# Altium PCB PCB.PcbDoc
Units mm, origin at the board's own origin, x right, y up, seen from the top; angles counter-clockwise.
Board outline 100 x 50 mm, 2 copper layers (Top Layer, Bottom Layer); 25 components, 19 nets, 89 pads, 0 vias.
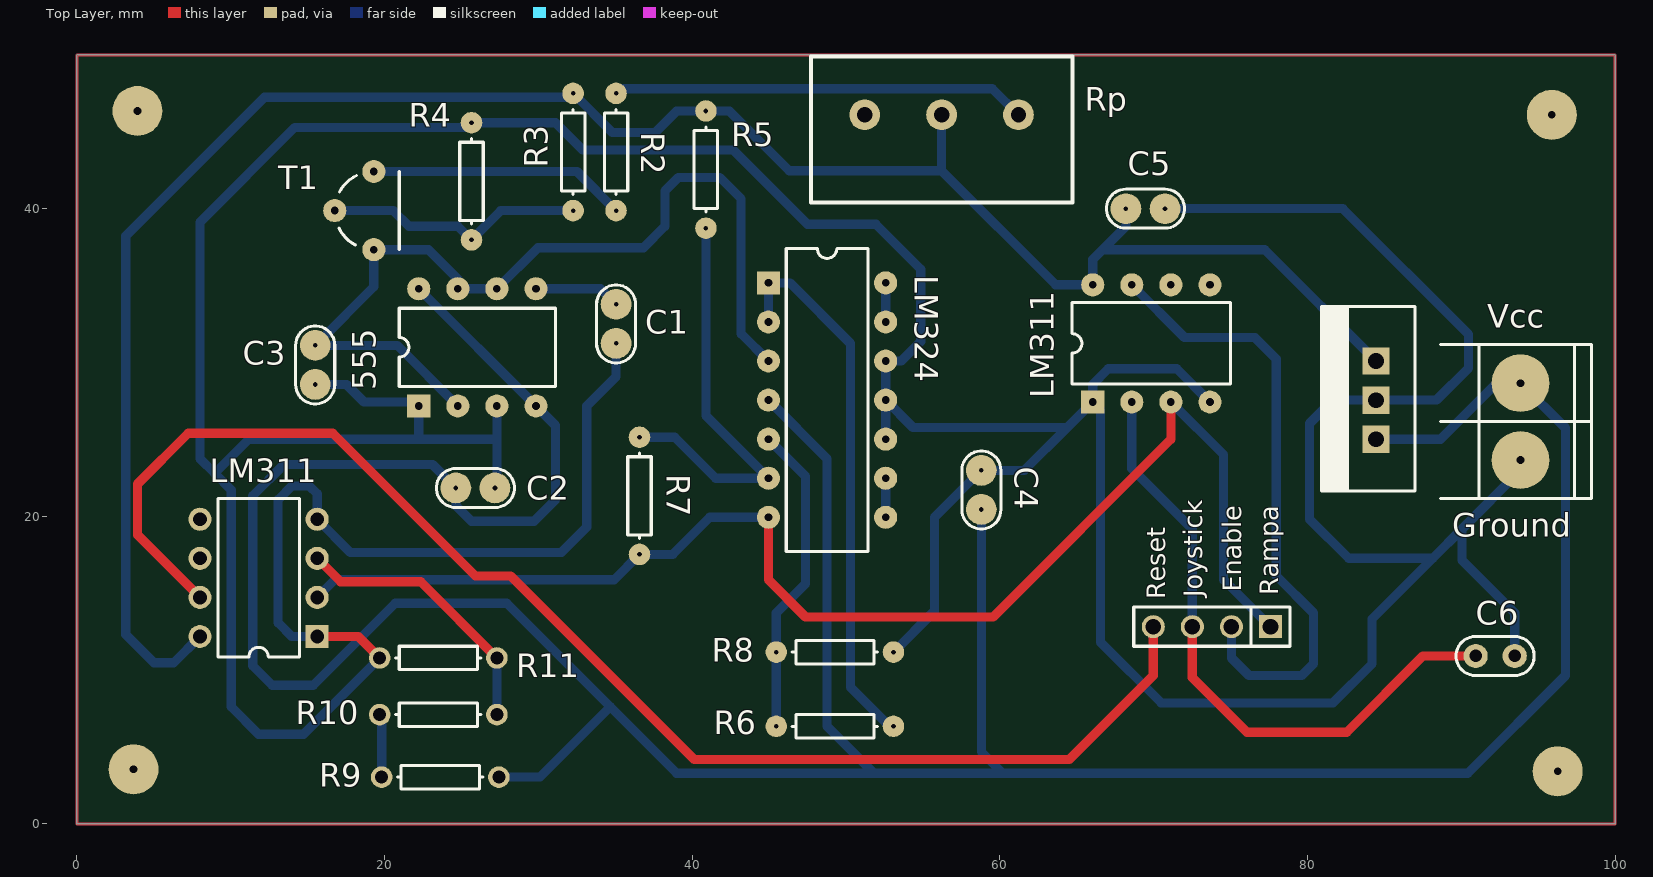
[diagram p0: Top Layer view]
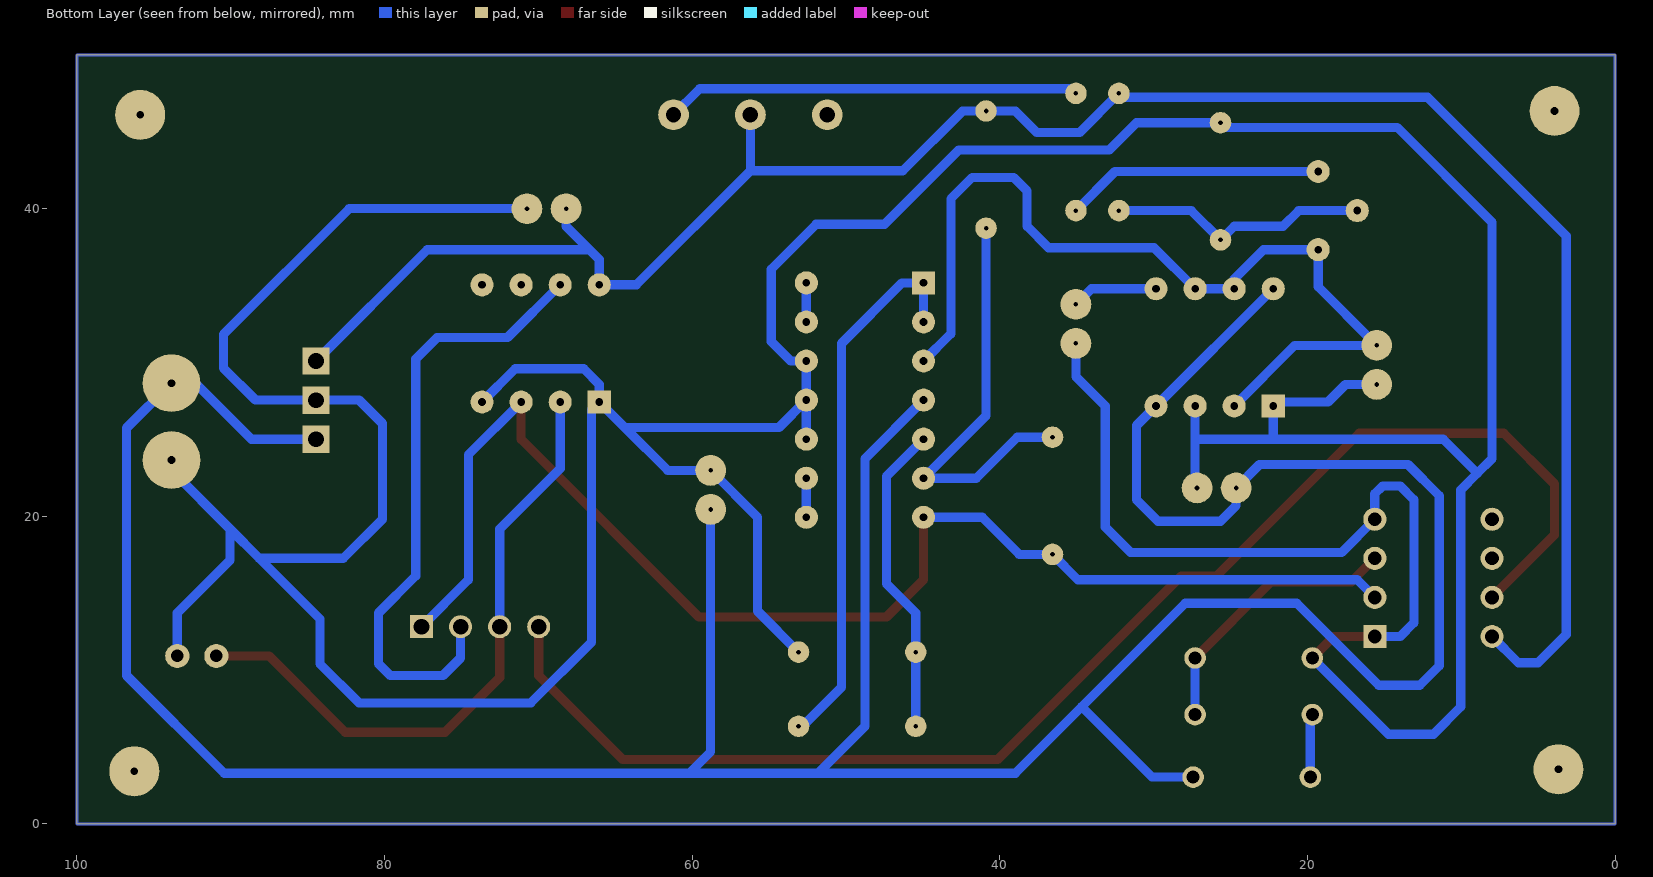
[diagram p1: Bottom Layer view, seen from below]

## Layer stack, top to bottom
Top Solder: solder mask 0.0102, Solder Resist, Dk 3.5
Top Layer: signal copper 0.0356
Dielectric 1: dielectric 0.32, FR-4, Dk 4.8
Bottom Layer: signal copper 0.0356
Bottom Solder: solder mask 0.0102, Solder Resist, Dk 3.5

## Board outline
0,0 100,0 100,50 0,50

## Design rules (kind name [scope] priority, off if disabled: settings)
Clearance [All] p1: gap=0.4 ignorepadtopadclearanceinfootprint=FALSE
PolygonConnect [All] p1: connectstyle=Relief reliefconductorwidth=0.254 reliefentries=4 polygonreliefangle="90 Angle" airgapwidth=0.254
RoomDefinition Esquematico [InComponentClass('Esquematico')] p1: confinementstyle=ConfineIn formatcopy=TRUE lockcomponents=FALSE outline -40.513,-61.722 10.287,-61.722 10.287,-36.322 -40.513,-36.322
RoutingVias [All] p1: holewidth=0.5 width=2 viastyle="Through Hole" minholewidth=0.5 minwidth=2 maxholewidth=0.5 maxwidth=2
SolderMaskExpansion [All] p1: expansion=0.102
Width [All] p1: maxlimit=0.6 minlimit=0.6 preferedwidth=0.6
30 further rules are at their usual default settings.

## Components (designator, comment, footprint, x,y, rotation, side; value= is the part's Value field where it differs from the comment)
555 "LM555" DIP8 22.225,27.178 r90 top (schematic designator G1)
C1 "0.1u" CAP100#1 35.052,32.512 r270 top
C2 "1p" CAP100#1 25.908,21.844 r0 top
C3 "220u" CAP100#1 15.494,29.845 r270 top
C4 "100n" CAP100#1 58.801,21.717 r90 top
C5 "100n" CAP100#1 69.469,40.005 r0 top
C6 "110u" CAP100#2 92.202,10.922 r0 top
Conversor "7805" "TO-220 V" 84.455,27.559 r90 top
LM311 "LM111JG" JG008#1 11.811,16.002 r90 top (schematic designator A3)
LM311 "LM111JG" JG008#2 69.85,31.242 r0 top (schematic designator A2)
LM324 "LM324N" N014 48.768,27.559 r270 top (schematic designator A1)
R2 "Res1" AXIAL-0.3#1 35.052,43.688 r90 top value=150
R3 "Res1" AXIAL-0.3#1 32.258,43.688 r90 top value=10K
R4 "Res1" AXIAL-0.3#1 25.654,41.783 r270 top value=20K
R5 "Res1" AXIAL-0.3#1 40.894,42.545 r90 top value=1K
R6 "Res1" AXIAL-0.3#1 49.276,6.35 r0 top value=1K
R7 "Res1" AXIAL-0.3#1 36.576,21.336 r90 top value=1K
R8 "Res1" AXIAL-0.3#1 49.276,11.176 r180 top value=1K
R9 "Res1" AXIAL-0.3#2 23.622,3.048 r0 top value=1k
R10 "Res1" AXIAL-0.3#2 23.495,7.112 r180 top value=1k
R11 "Res1" AXIAL-0.3#2 23.495,10.795 r0 top value=1k
Reset "CON4" SIP4 73.787,12.827 r180 top (schematic designator Pines)
Rp "POTENCIOMETRO" POTENCIOMETRO 56.214,46.101 r180 top
T1 "TRANSISTOR PNP" TO92 18.034,39.878 r270 top (schematic designator T!)
Vcc "BORNERA 2" BORNERA2 93.853,26.162 r180 top (schematic designator Alimentacion)

## Footprints (in the part's own frame and the unit in brackets; to place one, negate y for a bottom-side part, rotate by r counter-clockwise, add the part's x,y. Pads: shape width x height; smd on the part's side, far side on the other; paste and mask are expansions set on the pad)
AXIAL-0.3#1 [mm] "Axial Device, Thru-Hole; 2 Leads; 0.3 in Pin Spacing"
  round 1.4 hole 0.3: 1(-3.81,0) 2(3.81,0)
  silkscreen extent -2.77,-0.76 2.77,0.76
AXIAL-0.3#2 [mm] "Axial Device, Thru-Hole; 2 Leads; 0.3 in Pin Spacing"
  round 1.4 hole 0.85: 1(-3.81,0) 2(3.81,0)
  silkscreen extent -2.77,-0.76 2.77,0.76
BORNERA2 [mm] "Bornera con Tornillos 5mm separación"
  round 3.75 hole 0.5: 1(0,2.5) 2(0,-2.5)
  silkscreen extent -4.6,-5 5.2,5, body extent -3.76,-4.89 3.94,5.61, height 10
CAP100#1 [mm]
  round 2 hole 0.3: 1(-1.27,0) 2(1.27,0)
  silkscreen extent -2.54,-1.27 2.54,1.27, body extent -2.92,-0.84 2.92,0.86, height 6.12
CAP100#2 [mm]
  round 1.575 hole 0.813: 1(-1.27,0) 2(1.27,0)
  silkscreen extent -2.54,-1.27 2.54,1.27, body extent -2.92,-0.84 2.92,0.86, height 6.12
DIP8 [mm]
  rect 1.5x1.5 hole 0.5: 1(0,0)
  round 1.5 hole 0.5: 2(0,-2.54) 3(0,-5.08) 4(0,-7.62) 5(7.62,-7.62) 6(7.62,-5.08) 7(7.62,-2.54) 8(7.62,0)
  silkscreen extent 1.27,-8.89 6.35,1.27, body extent -0.06,-9.21 7.7,1.59, height 4.5
JG008#1 [mm] "DIP; 8 Leads; Row Spacing 7.62 mm; Pitch 2.54 mm"
  rect 1.5x1.5 hole 0.9: 1(-3.81,-3.81)
  round 1.5 hole 0.9: 2(-1.27,-3.81) 3(1.27,-3.81) 4(3.81,-3.81) 5(3.81,3.81) 6(1.27,3.81) 7(-1.27,3.81) 8(-3.81,3.81)
  silkscreen extent -5.15,-2.65 5.15,2.65, body extent -5.08,-3.93 5.08,3.93, height 5.08
JG008#2 [mm] "DIP; 8 Leads; Row Spacing 7.62 mm; Pitch 2.54 mm"
  rect 1.5x1.5 hole 0.5: 1(-3.81,-3.81)
  round 1.5 hole 0.5: 2(-1.27,-3.81) 3(1.27,-3.81) 4(3.81,-3.81) 5(3.81,3.81) 6(1.27,3.81) 7(-1.27,3.81) 8(-3.81,3.81)
  silkscreen extent -5.15,-2.65 5.15,2.65, body extent -5.08,-3.93 5.08,3.93, height 5.08
N014 [mm] "DIP; 14 Leads; Row Spacing 7.62 mm; Pitch 2.54 mm"
  rect 1.5x1.5 hole 0.5: 1(-7.62,-3.81)
  round 1.5 hole 0.5: 2(-5.08,-3.81) 3(-2.54,-3.81) 4(0,-3.81) 5(2.54,-3.81) 6(5.08,-3.81) 7(7.62,-3.81) 8(7.62,3.81) 9(5.08,3.81) 10(2.54,3.81) 11(0,3.81) 12(-2.54,3.81) 13(-5.08,3.81) 14(-7.62,3.81)
  silkscreen extent -9.85,-2.65 9.85,2.65
POTENCIOMETRO [mm]
  round 2 hole 1: 1(-5,0) 2(0,0) 3(5,0)
  silkscreen extent -8.5,-3.8 8.5,5.7, body extent -7.87,-20.53 7.87,5.03, height 20.12
SIP4 [mm]
  rect 1.5x1.5 hole 1.016: 1(-3.81,0)
  round 1.5 hole 1.016: 2(-1.27,0) 3(1.27,0) 4(3.81,0)
  silkscreen extent -5.08,-1.27 5.08,1.27, body extent -5.08,-1.27 5.08,1.27, height 8.38
TO92 [mm]
  round 1.5 hole 0.5: 1(0,-1.27) 2(2.54,1.27) 3(-2.54,1.27)
  silkscreen extent -2.54,-1 2.54,2.92, body extent -2.79,-1.55 2.79,2.79, height 8
"TO-220 V" [mil]
  rect 70x70 hole 40: 1(-100,0) 2(0,0) 3(100,0)
  silkscreen extent -232,-100 240,139, body extent -197,-79 197,118, height 709

## Part data
555: "Timer"
C1 C2 C3 C4 C5 C6: library part CAP
Conversor: library part 78XX, "REGULDOR POSITIVO"
LM311 LM311: "Differential Comparator with Strobe", ComponentLink1Description="Manufacturer Link", ComponentLink1URL=http://www.ti.com/, ComponentLink2Description=Datasheet, ComponentLink2URL=http://www-s.ti.com/sc/ds/lm111.pdf, DatasheetVersion=Feb-1992, LatestRevisionDate=04-Mar-2005, LatestRevisionNote="Stylized 3D Model Added.", PackageDescription="DIP; 8 Leads; Row Spacing 7.62 mm; Pitch 2.54 mm", PackageReference=JG008, PackageVersion=Jan-1995, Published=16-Jan-2001, Publisher="Altium Limited"
LM324: "Quadruple Operational Amplifier", ComponentLink1Description="Manufacturer Link", ComponentLink1URL=http://www.ti.com/, ComponentLink2Description=Datasheet, ComponentLink2URL=http://www-s.ti.com/sc/ds/lm324.pdf, DatasheetVersion=Feb-1997, LatestRevisionDate=04-Mar-2005, LatestRevisionNote="Stylized 3D Model Added.", PackageDescription="DIP; 14 Leads; Row Spacing 7.62 mm; Pitch 2.54 mm", PackageReference=N014, PackageVersion=Oct-1995, Published=16-Jan-2001, Publisher="Altium Limited"
R2 R3 R4 R5 R6 R7 R8 R9 R10 R11: "Resistor", LatestRevisionDate=17-Jul-2002, LatestRevisionNote="Re-released for DXP Platform.", PackageDescription="Axial Device, Thru-Hole; 2 Leads; 0.3 in Pin Spacing", PackageReference=AXIAL-0.3, Published=8-Jun-2000, Publisher="Altium Limited"

## Free pads (board coordinates)
  round 3.25 hole 0.5: 2(95.885,46.101) 3(96.266,3.429) 4(3.683,3.556) 5(3.937,46.355)

## Nets (pads, with @x,y where several pads share a name; then routed paths per layer and width w, separated by ;. In a path a pad name is that pad's centre, name@x,y a point inside that pad or via, vN(x,y) a via of type N, cw(c..) or ccw(c..) an arc to the next point about the centre after c; other vN are vias at no path point)
5.15: LM311.3@15.621,17.272 R10.1 R11.2 | length 18
  Top Layer w0.6: LM311.3@15.621,17.272 17.145,15.748 22.352,15.748 R11.2
  Bottom Layer w0.6: R10.1 R11.2
Enable: LM311.7@68.58,35.052 Reset.2 | length 40.4
  Bottom Layer w0.6: LM311.7@68.58,35.052 72.009,31.623 76.581,31.623 77.978,30.226 77.978,16.129 80.391,13.716 80.391,10.414 79.629,9.652 76.2,9.652 75.057,10.795 Reset.2
GND: 555.1 555.3 C1.2 C2.2 C3.2 C4.2 C5.2 C6.2 Conversor.2 LM311.1 LM311.4 LM324.10 LM324.11 LM324.12 R4.1 R8.1 R11.1 Vcc.1 | length 358.7
  Top Layer w0.6: LM311.1@15.621,12.192 18.288,12.192 R11.1
  Bottom Layer w0.6: C3.2 17.526,28.575 18.669,27.432 21.971,27.432 555.1 22.225,25.019 ; LM311.1@15.621,12.192 13.97,12.192 13.081,13.081 13.081,21.082 13.97,21.971 15.113,21.971 15.621,21.463 15.621,19.812 17.78,17.653 31.496,17.653 33.147,19.304 33.147,27.178 35.052,29.083 C1.2 ; R11.1 14.732,5.842 11.811,5.842 10.033,7.62 10.033,21.717 8.954,22.796 ; C2.2 27.305,21.971 27.305,25.019 ; 555.3 27.305,25.019 ; LM324.10 LM324.11 ; R8.1 55.753,13.843 55.753,19.939 C4.2 61.595,22.987 64.389,25.781 ; C5.2 82.296,40.005 90.471,31.83 90.471,29.638 88.392,27.559 Conversor.2 81.661,27.559 80.137,26.035 80.137,19.812 82.677,17.272 88.138,17.272 ; LM311.4@73.787,27.559 73.66,27.432 71.501,29.591 67.056,29.591 66.04,28.575 LM311.1@66.04,27.432 ; C6.2 93.472,13.716 90.043,17.145 90.043,19.177 ; Vcc.1 93.853,22.987 90.043,19.177 ; 8.954,22.796 8.001,23.749 8.001,39.116 14.172,45.287 25.348,45.287 R4.1 31.115,45.593 32.893,43.815 42.672,43.815 47.498,38.989 51.943,38.989 54.864,36.068 54.864,31.369 53.594,30.099 LM324.12 LM324.11 ; 8.954,22.796 11.176,25.019 22.225,25.019 ; 22.225,25.019 27.305,25.019 ; LM324.11 54.356,25.781 64.389,25.781 ; 64.389,25.781 LM311.1@66.04,27.432 ; LM311.1@66.04,27.432 66.548,26.924 66.548,11.811 70.485,7.874 81.661,7.874 84.201,10.414 84.201,13.335 88.138,17.272 ; 88.138,17.272 90.043,19.177
Joystick: C6.1 LM311.2@68.58,27.432 Reset.3 | length 41.5
  Top Layer w0.6: Reset.3 72.517,9.525 76.073,5.969 82.55,5.969 87.503,10.922 C6.1
  Bottom Layer w0.6: LM311.2@68.58,27.432 68.58,23.114 72.517,19.177 Reset.3
NetA1_1: LM324.1 LM324.2 R6.2 | length 35.7
  Bottom Layer w0.6: LM324.2 LM324.1 46.355,35.179 50.292,31.242 50.292,8.89 52.832,6.35 R6.2
NetA1_3: 555.2 555.6 555.7 C3.1 LM324.3 T1.2 | length 59.8
  Bottom Layer w0.6: C3.1 20.828,31.115 555.2 ; C3.1@15.748,31.369 19.304,34.925 T1.2 22.86,37.338 24.765,35.433 555.7 555.6 29.972,37.465 36.83,37.465 38.227,38.862 38.227,41.148 39.116,42.037 41.783,42.037 43.18,40.64 43.18,31.877 LM324.3
NetA1_5: LM324.5 R6.1 R8.2 | length 20.5
  Bottom Layer w0.6: LM324.5 47.371,22.606 47.371,15.621 45.466,13.716 R8.2 R6.1
NetA1_6: LM324.6 R5.1 R7.2 | length 27.4
  Bottom Layer w0.6: R7.2 38.862,25.146 41.529,22.479 LM324.6 40.894,26.543 R5.1
NetA1_8: LM324.8 LM324.9 | length 2.5
  Bottom Layer w0.6: LM324.8 LM324.9
NetA1_13: LM324.13 LM324.14 | length 2.5
  Bottom Layer w0.6: LM324.13 LM324.14
NetC1_1: 555.5 C1.1 | length 5.6
  Bottom Layer w0.6: 555.5 34.036,34.798 C1.1
NetR2_1: R2.1 T1.3 | length 16.8
  Bottom Layer w0.6: T1.3 32.512,42.418 R2.1
NetR2_2: R2.2 Rp.1 | length 27.4
  Bottom Layer w0.6: R2.2 35.355,47.801 59.514,47.801 Rp.1 Rp.1@60.833,46.101
NetR3_1: R3.1 R4.2 T1.1 | length 17.1
  Bottom Layer w0.6: T1.1 20.574,39.878 21.59,38.862 24.765,38.862 R4.2 27.559,39.878 R3.1
NetR9_1: R9.1 R10.2 | length 4.1
  Bottom Layer w0.6: R10.2 19.812,6.985 R9.1
Rampa: LM311.2@15.621,14.732 LM311.3@71.12,27.432 LM324.7 R7.1 Reset.1 | length 87.2
  Top Layer w0.6: LM324.7 44.958,15.875 47.371,13.462 59.563,13.462 71.12,25.019 LM311.3@71.12,27.432
  Bottom Layer w0.6: LM311.2@15.621,14.732 16.764,15.875 34.925,15.875 R7.1 38.735,17.526 41.148,19.939 LM324.7 ; LM311.3@71.12,27.432 74.549,24.003 74.549,15.875 Reset.1
Reset: LM311.7@8.001,14.732 Reset.4 | length 90.7
  Top Layer w0.6: LM311.7@8.001,14.732 3.937,18.796 3.937,22.098 7.239,25.4 16.637,25.4 25.908,16.129 28.194,16.129 40.132,4.191 64.516,4.191 69.977,9.652 Reset.4
V5: C5.1 Conversor.3 LM311.8 R3.2 R5.2 Rp.2 | length 135.5
  Bottom Layer w0.6: LM311.8@8.001,12.192 6.286,10.477 5.016,10.477 3.175,12.319 3.175,38.227 12.192,47.244 32.004,47.244 R3.2 34.798,44.958 37.592,44.958 38.989,46.355 R5.2 42.418,46.355 46.308,42.465 56.214,42.465 ; Rp.2 56.214,42.465 ; C5.1 68.199,38.862 66.675,37.338 ; Conversor.3 77.216,37.338 66.675,37.338 ; 56.214,42.465 63.627,35.052 66.04,35.052 66.04,36.703 66.675,37.338
Vcc: 555.4 555.8 C2.1 C4.1 Conversor.1 LM324.4 R9.2 Vcc.2 | length 232.1
  Bottom Layer w0.6: 555.8 555.4 31.115,25.908 31.115,21.082 29.718,19.685 25.654,19.685 24.638,20.701 C2.1 23.114,23.368 13.462,23.368 11.43,21.336 11.43,10.287 12.7,9.017 15.367,9.017 20.701,14.351 27.94,14.351 34.671,7.62 ; R9.2 30.099,3.048 34.671,7.62 ; LM324.4 48.768,23.749 48.768,6.35 51.816,3.302 ; C4.1 58.801,4.699 60.198,3.302 ; Conversor.1 88.646,25.019 92.289,28.662 Vcc.2 96.774,25.741 96.774,9.652 90.424,3.302 60.198,3.302 ; 34.671,7.62 38.989,3.302 51.816,3.302 ; 51.816,3.302 60.198,3.302
pads on no net: LM311.5 LM311.6 Rp.3
copper on no net: | length 600
  Top Layer w0.2: 0,0 0,50 100,50 100,0 0,0
  Bottom Layer w0.2: 0,0 0,50 100,50 100,0 0,0

## Silkscreen, mask and mechanical layers (free items; w line width, h text height)
Top Overlay:
  text "Ground" at 89.408,18.669 h1.52
  text "Enable" at 75.692,15.113 h1.2 r90
  text "Rampa" at 78.105,14.859 h1.2 r90
  text "Joystick" at 73.152,14.732 h1.2 r90